# Altium PCB Camera.PcbDoc
Units mm, origin at the board's own origin, x right, y up, seen from the top; angles counter-clockwise.
Board outline 30 x 20 mm, 4 copper layers (Top Layer, L2 - GND, L2 - PWR/GND, Bottom Layer), stack 1.591 mm thick; 77 components, 31 nets, 305 pads, 41 vias.
Unrouted connection lines stored in the file: 94.
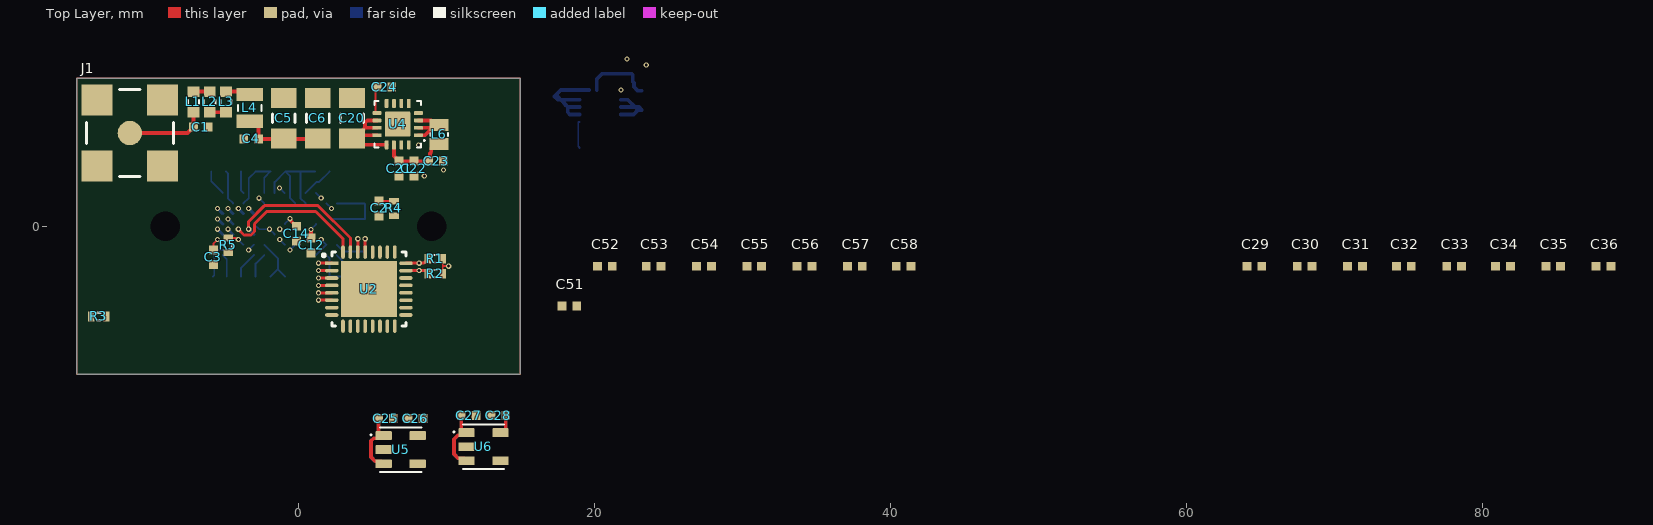
[diagram p0: Top Layer view]
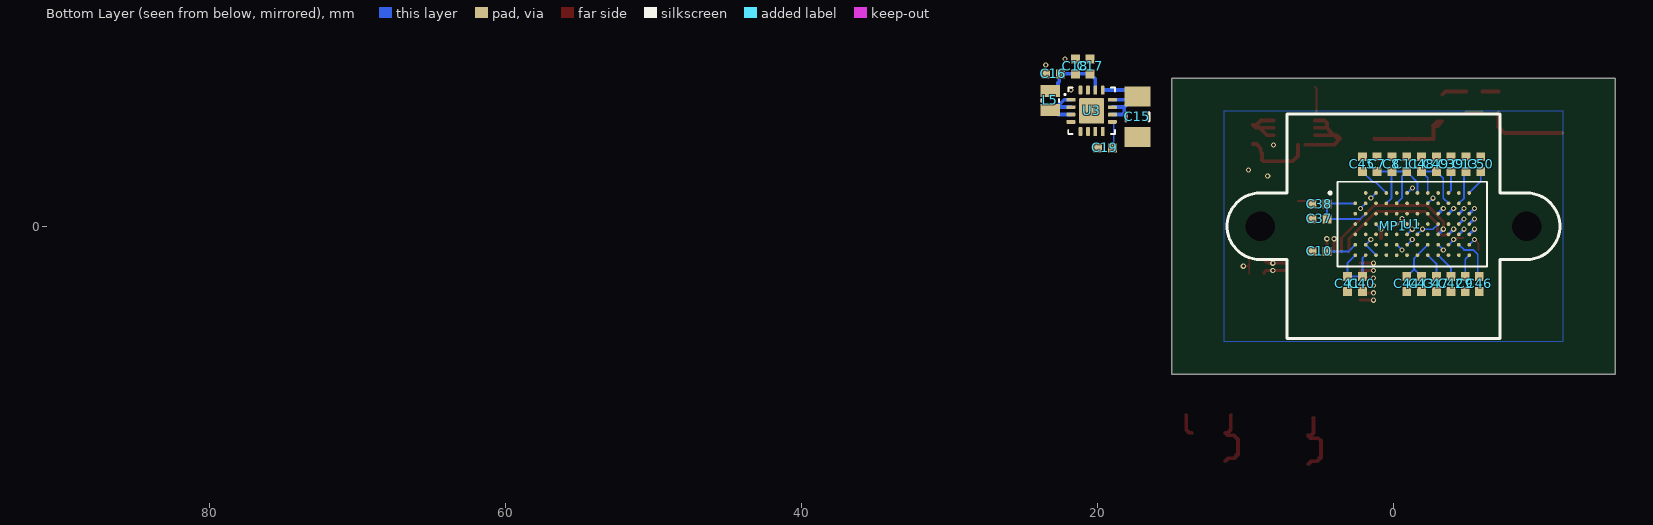
[diagram p1: Bottom Layer view, seen from below]
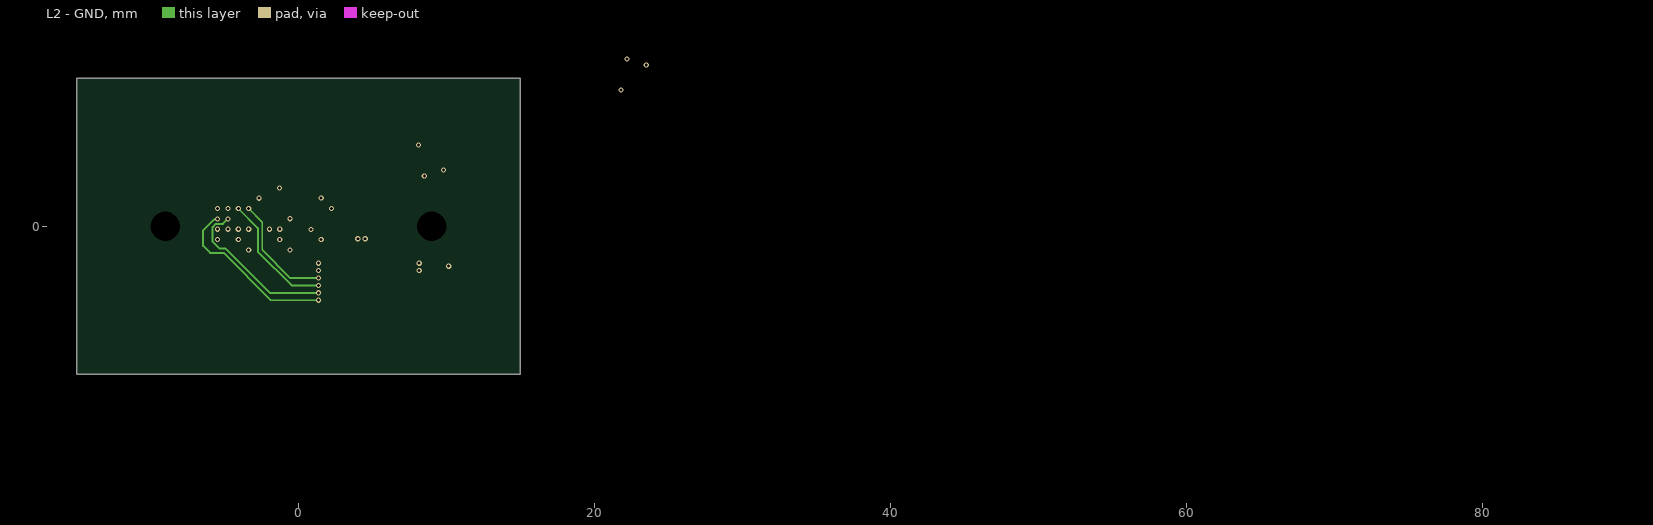
[diagram p2: L2 - GND]
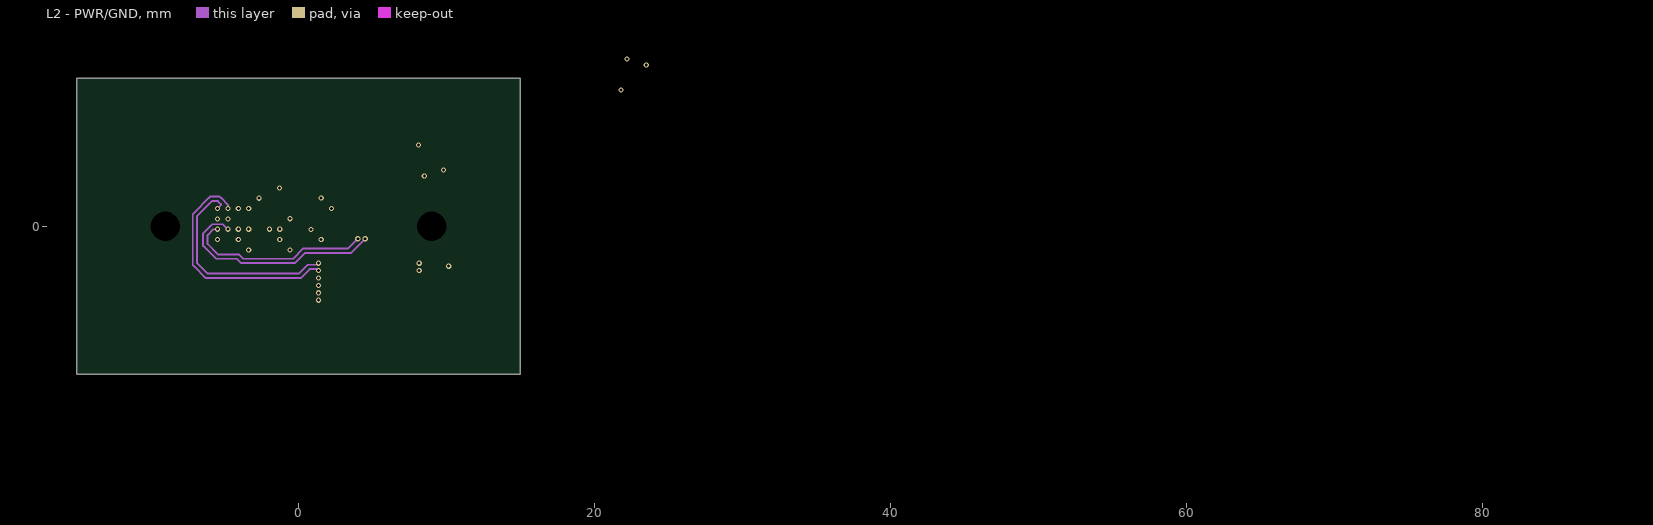
[diagram p3: L2 - PWR/GND]

## Layer stack, top to bottom
Top Solder: solder mask 0.015, SM-001, Dk 4
Top Layer: signal copper 0.035
Dielectric 2: prepreg 0.2104, PP-006, Dk 4.3
L2 - GND: signal copper 0.0175
Dielectric 1: core 1.065, FR4_TG135_TG150_Dk4.3_Df0.02, Dk 4.3
L2 - PWR/GND: signal copper 0.0175
Dielectric 3: prepreg 0.2104, PP-006, Dk 4.3
Bottom Layer: signal copper 0.035
Bottom Solder: solder mask 0.015, SM-001, Dk 4

## Board outline
-15,-10 15,-10 15,10 -15,10

## Design rules (kind name [scope] priority, off if disabled: settings)
AssemblyTestPointUsage [All] p1: isadvanced=TRUE
AssemblyTestpoint [All] p1: isadvanced=TRUE testpointundercomponent=TRUE minsize=1.016 maxsize=2.54 preferedsize=1.524 minholesize=0 maxholesize=1.016 preferedholesize=0.813 testpointgrid=0.025 usegrid=TRUE gridoriginx=166.25 gridoriginy=192.7 gridtolerance=0 allowsidetop=TRUE allowsidebottom=TRUE
BoardOutlineClearance BoardOutlineClearance_1 [All] p1: isadvanced=TRUE gap=0.2 ignorepadtopadclearanceinfootprint=FALSE
Clearance Clearance_1 [(ExistsOnLayer('L2 - GND') Or ExistsOnLayer('L2 - PWR/GND')) vs (ExistsOnLayer('L2 - GND') Or ExistsOnLayer('L2 - PWR/GND'))] p1: gap=0.1 ignorepadtopadclearanceinfootprint=FALSE sourcerule=46 cellrowname=All cellrowtype=0 cellcolname=All cellcoltype=0 innerlayers=TRUE
Clearance Clearance_2 [(ExistsOnLayer('Top Layer') Or ExistsOnLayer('Bottom Layer')) vs (ExistsOnLayer('Top Layer') Or ExistsOnLayer('Bottom Layer'))] p2: gap=0.1 ignorepadtopadclearanceinfootprint=FALSE sourcerule=46 cellrowname=All cellrowtype=0 cellcolname=All cellcoltype=0 outerlayers=TRUE
Clearance [All] p3: gap=0.254 ignorepadtopadclearanceinfootprint=FALSE ismatrix=TRUE
ComponentClearance ComponentClearance_LensHolder [InComponent('MP1')] p1: gap=-100 collisioncheckmode=3 verticalgap=-100 showdistances=FALSE
ComponentClearance [All] p2: isadvanced=TRUE gap=0.254 collisioncheckmode=3 verticalgap=0.254 showdistances=FALSE
DiffPairsRouting [All] p1: maxlimit=0.186 minlimit=0.17 mostfreqgap=0.186 toplayer_mingap=0.186 toplayer_minwidth=0.2 toplayer_maxwidth=0.2 toplayer_prefwidth=0.2 midlayer1_maxgap=0.17 midlayer1_prefgap=0.17 midlayer1_minwidth=0.127 midlayer1_maxwidth=0.127 midlayer1_prefwidth=0.127 midlayer2_maxgap=0.17 midlayer2_prefgap=0.17 midlayer2_minwidth=0.127 midlayer2_maxwidth=0.127 midlayer2_prefwidth=0.127 bottomlayer_mingap=0.186 bottomlayer_minwidth=0.2 bottomlayer_maxwidth=0.2 bottomlayer_prefwidth=0.2 impedanceprofiledriven=TRUE impedanceprofileid={404B1338-802D-463F-9344-648F71163B0D} impedanceprofilevalue=100.000000 maxuncoupledlength=12.7
FabricationTestPointUsage [All] p1: isadvanced=TRUE valid=0 allowmultiple=FALSE
FabricationTestpoint [All] p1: isadvanced=TRUE side=3 testpointundercomponent=TRUE minsize=1.016 maxsize=2.54 preferedsize=1.524 minholesize=0 maxholesize=1.016 preferedholesize=0.813 testpointgrid=0.025 allowsidetop=TRUE allowsidebottom=TRUE usegrid=TRUE gridoriginx=166.25 gridoriginy=192.7 gridtolerance=0
FanoutControl Fanout_BGA [IsBGA] p1: isadvanced=TRUE bgadir=Out bgaviamode=Centered fanoutstyle=Auto fanoutdirection=Alternating viagrid=0.025 // Fanout_BGA (Default Rule)
FanoutControl Fanout_LCC [IsLCC] p2: isadvanced=TRUE bgadir=Out bgaviamode=Centered fanoutstyle=Auto fanoutdirection=Alternating viagrid=0.025 // Fanout_LCC (Default Rule)
FanoutControl Fanout_SOIC [IsSOIC] p3: isadvanced=TRUE bgadir=Out bgaviamode=Centered fanoutstyle=Auto fanoutdirection=Alternating viagrid=0.025 // Fanout_SOIC (Default Rule)
FanoutControl Fanout_Small [(CompPinCount < 5)] p4: isadvanced=TRUE bgadir=Out bgaviamode=Centered fanoutstyle=Auto fanoutdirection=OutThenIn viagrid=0.025 // Fanout_Small (Default Rule)
FanoutControl Fanout_Default [All] p5: isadvanced=TRUE bgadir=Out bgaviamode=Centered fanoutstyle=Auto fanoutdirection=Alternating viagrid=0.025 // Fanout_Default (Default Rule)
Height [All] p1: isadvanced=TRUE minheight=0 maxheight=25.4 prefheight=12.7
HoleSize [All] p1: isadvanced=TRUE absolutevalues=TRUE maxlimit=5 minlimit=0.2 maxpercent=80.000 minpercent=20.000
HoleToHoleClearance [All] p1: isadvanced=TRUE gap=0.254 allowstackedmicrovias=TRUE
LayerPairs [All] p1: isadvanced=TRUE enforce=TRUE
MinimumSolderMaskSliver [All] p1: isadvanced=TRUE minsoldermaskwidth=0.1
NetAntennae [All] p1: isadvanced=TRUE netantennaetolerance=0
PasteMaskExpansion [All] p1: isadvanced=TRUE expansion=0
PlaneClearance [All] p1: isadvanced=TRUE clearance=0.254
PlaneConnect [All] p1: isadvanced=TRUE pad.planeconnectstyle=Relief pad.reliefexpansion=0.508 pad.reliefentries=4 pad.reliefconductorwidth=0.254 pad.reliefairgap=0.254 via.planeconnectstyle=Direct via.reliefexpansion=0.508 via.reliefentries=4 via.reliefconductorwidth=0.254 via.reliefairgap=0.254
PolygonConnect [All] p1: thpad.connectstyle=Relief thpad.reliefconductorwidth=0.127 thpad.reliefentries=4 thpad.polygonreliefangle="90 Angle" thpad.airgapwidth=0.127 smdpad.connectstyle=Relief smdpad.reliefconductorwidth=0.127 smdpad.reliefentries=4 smdpad.polygonreliefangle="90 Angle" smdpad.airgapwidth=0.127 via.connectstyle=Direct via.reliefconductorwidth=0.254 via.reliefentries=4 via.polygonreliefangle="90 Angle" via.airgapwidth=0.254
PolygonConnect PolygonConnectStyle_Direct [IsNamedPolygon('PolygonDirect')] p2: isadvanced=TRUE connectstyle=Direct reliefconductorwidth=0.254 reliefentries=2 polygonreliefangle="0 Angle" airgapwidth=0.254
RoutingCorners [All] p1: isadvanced=TRUE cornerstyle=45-Degree minsetback=2.54 maxsetback=2.54
RoutingPriority [All] p1: isadvanced=TRUE routingpriority=0
RoutingVias [All] p1: holewidth=0.3 width=0.45 viastyle="Through Hole" minholewidth=0.2 minwidth=0.35 maxholewidth=0.45 maxwidth=0.6
ShortCircuit [All] p1: isadvanced=TRUE allowed=FALSE
SilkToSilkClearance [All] p1: isadvanced=TRUE silktosilkclearance=0.127
SilkToSolderMaskClearance [IsPad] p1: isadvanced=TRUE minsilkscreentomaskgap=0.127 clearancetoexposedcopper=TRUE
SolderMaskExpansion SolderMaskExpansion_via [IsVia] p1: isadvanced=TRUE expansion=0.102 istentingtop=TRUE useseparateexpansions=TRUE expansionbottom=0.102 istentingbottom=TRUE
SolderMaskExpansion [All] p2: isadvanced=TRUE expansion=0.102 istentingtop=FALSE
SupplyNets "Schematic Supply Nets_6" [InNet('3V3')] p1: voltage=0.000
SupplyNets "Schematic Supply Nets_5" [InNet('2V8')] p2: voltage=0.000
SupplyNets "Schematic Supply Nets_4" [InNet('1V2')] p3: voltage=0.000
SupplyNets "Schematic Supply Nets_3" [InNet('1V8')] p4: voltage=0.000
SupplyNets "Schematic Supply Nets_1" [InNet('12V_VPOC')] p5: voltage=0.000
SupplyNets "Schematic Supply Nets" [InNet('GND')] p6: voltage=0.000
UnRoutedNet [All] p1: isadvanced=TRUE
UnpouredPolygon [All] p1: isadvanced=TRUE
Width [All] p1: maxlimit=0.254 minlimit=0.127 preferedwidth=0.254
3 further rules are at their usual default settings.

## Classes and differential pairs
net class S50: FPD_DATA FPD_DOUT_N FPD_DOUT_P
component class Power: C15 C16 C17 C18 C19 C20 C21 C22 C23 C24 C25 C26 C27 C28 L5 L6 U3 U4 U5 U6
component class Top: 2 C1 C2 C3 C4 C5 C6 C7 C8 C9 C10 C11 C12 C13 C14 C29 C30 C31 C32 C33 C34 C35 C36 C37 C38 C39 C40 C41 C42 C43 C44 C45 C46 C47 C48 C49 C50 C51 C52 C53 C54 C55 C56 C57 C58 J1 L1 L2 L3 L4 MP1 R1 R2 R3 R4 R5 U1 U2
differential pair MIPI_D3: +MIPI_D3_P -MIPI_D3_N
differential pair MIPI_D2: +MIPI_D2_P -MIPI_D2_N
differential pair MIPI_D1: +MIPI_D1_P -MIPI_D1_N
differential pair MIPI_D0: +MIPI_D0_P -MIPI_D0_N
differential pair MIPI_CLK: +MIPI_CLK_P -MIPI_CLK_N

## Components (designator, comment, footprint, x,y, rotation, side; value= is the part's Value field where it differs from the comment)
C1 "GRM155R71H473KE14D" "Generic 0402 capacitor" -6.6,6.7 r180 top value=47nF
C2 "GRM155R71H473KE14D" "Generic 0402 capacitor" 5.45,1.2 r90 top value=47nF
C3 "MAASL105CD7105MFCA01" "Generic 0402 capacitor" -5.75,-2.1 r90 top value=1µF
C4 "GRT155R71H104KE01D" "Generic 0402 capacitor" -3.2,5.9 r0 top value=100nF
C5 "CL31A106MBHNNNE" "Generic 1206 Capacitor" -1,7.3 r270 top value=10µF
C6 "CL31A106MBHNNNE" "Generic 1206 Capacitor" 1.3,7.3 r270 top value=10µF
C7 "GRT155R71H104KE01D" "Generic 0402 capacitor" 1.1,4.2 r270 bottom value=100nF
C8 "GRT155R71H104KE01D" "Generic 0402 capacitor" 0.1,4.2 r270 bottom value=100nF
C9 "GRT155R71H104KE01D" "Generic 0402 capacitor" -4.85,-3.9 r90 bottom value=100nF
C10 "GRT155R71H104KE01D" "Generic 0402 capacitor" 5,-1.7 r180 bottom value=100nF
C11 "GRT155R71H104KE01D" "Generic 0402 capacitor" -0.9,4.2 r270 bottom value=100nF
C12 "GRT155R71H104KE01D" "Generic 0402 capacitor" 0.85,-1.3 r90 top value=100nF
C13 "GRT155R71H104KE01D" "Generic 0402 capacitor" -4.9,4.2 r270 bottom value=100nF
C14 "GRT155R71H104KE01D" "Generic 0402 capacitor" -0.15,-0.5 r90 top value=100nF
C15 "CL31A106MBHNNNE" "Generic 1206 Capacitor" 17.3,7.4 r90 bottom value=10µF
C16 "MAASL105CD7105MFCA01" "Generic 0402 capacitor" 23,10.3 r180 bottom value=1µF
C17 "GRT155C80J106ME13J" "Generic 0402 capacitor" 20.5,10.8 r270 bottom value=10µF
C18 "GRT155C80J106ME13J" "Generic 0402 capacitor" 21.5,10.8 r270 bottom value=10µF
C19 "GCM155R72A472KA37D" "Generic 0402 capacitor" 19.5,5.3 r180 bottom value=4.7nF
C20 "CL31A106MBHNNNE" "Generic 1206 Capacitor" 3.6,7.3 r270 top value=10µF
C21 "MAASL105CD7105MFCA01" "Generic 0402 capacitor" 6.8,3.9 r90 top value=1µF
C22 "GRT155C80J106ME13J" "Generic 0402 capacitor" 7.8,3.9 r90 top value=10µF
C23 "GRT155C80J106ME13J" "Generic 0402 capacitor" 9.3,4.4 r180 top value=10µF
C24 "GCM155R72A472KA37D" "Generic 0402 capacitor" 5.8,9.4 r180 top value=4.7nF
C25 "MAASL105CD7105MFCA01" "Generic 0402 capacitor" 5.9,-13 r180 top value=1µF
C26 "MAASL105CD7105MFCA01" "Generic 0402 capacitor" 7.9,-13 r0 top value=1µF
C27 "MAASL105CD7105MFCA01" "Generic 0402 capacitor" 11.5,-12.8 r180 top value=1µF
C28 "MAASL105CD7105MFCA01" "Generic 0402 capacitor" 13.5,-12.8 r0 top value=1µF
C29 "GRT155R71H104KE01D" "Generic 0402 capacitor" 64.599,-2.7 r0 top value=100nF
C30 "GRT155R71H104KE01D" "Generic 0402 capacitor" 67.999,-2.7 r0 top value=100nF
C31 "GRT155R71H104KE01D" "Generic 0402 capacitor" 71.399,-2.7 r0 top value=100nF
C32 "GRT155R71H104KE01D" "Generic 0402 capacitor" 74.699,-2.7 r0 top value=100nF
C33 "GRT155R71H104KE01D" "Generic 0402 capacitor" 78.099,-2.7 r0 top value=100nF
C34 "GRT155R71H104KE01D" "Generic 0402 capacitor" 81.399,-2.7 r0 top value=100nF
C35 "GRT155R71H104KE01D" "Generic 0402 capacitor" 84.799,-2.7 r0 top value=100nF
C36 "GRT155R71H104KE01D" "Generic 0402 capacitor" 88.199,-2.7 r0 top value=100nF
C37 "GRT155R71H104KE01D" "Generic 0402 capacitor" 5,0.5 r180 bottom value=100nF
C38 "GRT155R71H104KE01D" "Generic 0402 capacitor" 5,1.5 r180 bottom value=100nF
C39 "GRT155R71H104KE01D" "Generic 0402 capacitor" -3.9,4.2 r270 bottom value=100nF
C40 "GRT155R71H104KE01D" "Generic 0402 capacitor" 2.1,-3.9 r90 bottom value=100nF
C41 "GRT155R71H104KE01D" "Generic 0402 capacitor" 3.1,-3.9 r90 bottom value=100nF
C42 "GRT155R71H104KE01D" "Generic 0402 capacitor" -3.9,-3.9 r90 bottom value=100nF
C43 "GRT155R71H104KE01D" "Generic 0402 capacitor" -1.9,-3.9 r90 bottom value=100nF
C44 "GRT155R71H104KE01D" "Generic 0402 capacitor" -0.9,-3.9 r90 bottom value=100nF
C45 "GRT155R71H104KE01D" "Generic 0402 capacitor" 2.1,4.2 r270 bottom value=100nF
C46 "GRT155R71H104KE01D" "Generic 0402 capacitor" -5.8,-3.9 r90 bottom value=100nF
C47 "GRT155R71H104KE01D" "Generic 0402 capacitor" -2.9,-3.9 r90 bottom value=100nF
C48 "GRT155R71H104KE01D" "Generic 0402 capacitor" -1.9,4.2 r270 bottom value=100nF
C49 "GRT155R71H104KE01D" "Generic 0402 capacitor" -2.9,4.2 r270 bottom value=100nF
C50 "GRT155R71H104KE01D" "Generic 0402 capacitor" -5.9,4.2 r270 bottom value=100nF
C51 "GRT155R71H104KE01D" "Generic 0402 capacitor" 18.3,-5.4 r0 top value=100nF
C52 "GRT155R71H104KE01D" "Generic 0402 capacitor" 20.7,-2.7 r0 top value=100nF
C53 "GRT155R71H104KE01D" "Generic 0402 capacitor" 24,-2.7 r0 top value=100nF
C54 "GRT155R71H104KE01D" "Generic 0402 capacitor" 27.4,-2.7 r0 top value=100nF
C55 "GRT155R71H104KE01D" "Generic 0402 capacitor" 30.8,-2.7 r0 top value=100nF
C56 "GRT155R71H104KE01D" "Generic 0402 capacitor" 34.2,-2.7 r0 top value=100nF
C57 "GRT155R71H104KE01D" "Generic 0402 capacitor" 37.599,-2.7 r0 top value=100nF
C58 "GRT155R71H104KE01D" "Generic 0402 capacitor" 40.899,-2.7 r0 top value=100nF
J1 "MCX-J-P-H-ST-SM1-TR" MCX-J-P-H-ST-SM1-TR -11.4,6.3 r0 top
L1 "BLM18HE152SN1D" 0603_1.6x0.8x0.8mm_IND -7.1,8.4 r90 top
L2 "BLM18HE152SN1D" 0603_1.6x0.8x0.8mm_IND -6,8.4 r270 top
L3 "BLM18HE152SN1D" 0603_1.6x0.8x0.8mm_IND -4.9,8.4 r90 top
L4 "BRC2016T100K" 0805_2.0x1.6x1.6mm_IND -3.3,8 r270 top value=10µH
L5 "HTEH20120H2R2MSR" 0805_2.0x1.2x0.8mm_IND 23.2,8.5 r90 bottom value=2.2µH
L6 "HTEH20120H2R2MSR" 0805_2.0x1.2x0.8mm_IND 9.5,6.2 r270 top value=2.2µH
MP1 "PT-LH008P" M12_lens_holder 0,0 r0 bottom locked
R1 "RMCF0402JT1K50" "Generic 0402 Resistor" 9.25,-2.2 r0 top value=1.5k
R2 "RMCF0402JT1K50" "Generic 0402 Resistor" 9.25,-3.2 r0 top value=1.5k
R3 "RCA04024K02FKEDSR" "Generic 0402 Resistor" -13.5,-6.1 r0 top value=4.02k
R4 "RMCA0402FT49R9-HP" "Generic 0402 Resistor" 6.45,1.2 r90 top value=49.9
R5 "RMCF0402JT1K50" "Generic 0402 Resistor" -4.75,-1.3 r270 top value=1.5k
U1 "AR0234CSSM00SUKA0-CP" 83-VFBGA -1.271,0.148 r180 bottom locked
U2 "DS90UB953TRHBTQ1" VQFN-32_5x5x1.0mm_P0.5mm 4.753,-4.25 r0 top
U3 "TPS62152RGTR" VQFN-16_3x3x1.0mm_P0.5mm 20.4,7.8 r180 bottom
U4 "TPS62151RGTR" VQFN-16_3x3x1.0mm_P0.5mm 6.7,6.9 r180 top
U5 "TPS7A2028PDBVR" SOT23-3_3x5x1.1mm_P0.95mm 6.9,-15.1 r0 top
U6 "TLV75512PDBVR" SOT23-3_3x5x1.1mm_P0.95mm 12.5,-14.9 r0 top

## Footprints (in the part's own frame and the unit in brackets; to place one, negate y for a bottom-side part, rotate by r counter-clockwise, add the part's x,y. Pads: shape width x height; smd on the part's side, far side on the other; paste and mask are expansions set on the pad)
83-VFBGA [mm] "AR0234CSSM00SUKA0-CP"
  round 0.25 smd: A2(-3.15,2.1) A3(-2.45,2.1) A4(-1.75,2.1) A5(-1.05,2.1) A6(-0.35,2.1) A7(0.35,2.1) A8(1.05,2.1) A9(1.75,2.1) A10(2.45,2.1) A11(3.15,2.1) A12(3.85,2.1) B1(-3.85,1.4) B2(-3.15,1.4) B3(-2.45,1.4) B4(-1.75,1.4) B5(-1.05,1.4) B6(-0.35,1.4) B7(0.35,1.4) B8(1.05,1.4) B9(1.75,1.4) B10(2.45,1.4) B11(3.15,1.4) B12(3.85,1.4) C1(-3.85,0.7) C2(-3.15,0.7) C3(-2.45,0.7) C4(-1.75,0.7) C5(-1.05,0.7) C6(-0.35,0.7) C7(0.35,0.7) C8(1.05,0.7) C9(1.75,0.7) C10(2.45,0.7) C11(3.15,0.7) C12(3.85,0.7) D1(-3.85,0) D2(-3.15,0) D3(-2.45,0) D4(-1.75,0) D5(-1.05,0) D6(-0.35,0) D7(0.35,0) D8(1.05,0) D9(1.75,0) D10(2.45,0) D11(3.15,0) D12(3.85,0) E1(-3.85,-0.7) E2(-3.15,-0.7) E3(-2.45,-0.7) E4(-1.75,-0.7) E5(-1.05,-0.7) E6(-0.35,-0.7) E7(0.35,-0.7) E8(1.05,-0.7) E9(1.75,-0.7) E10(2.45,-0.7) E11(3.15,-0.7) E12(3.85,-0.7) F1(-3.85,-1.4) F2(-3.15,-1.4) F3(-2.45,-1.4) F4(-1.75,-1.4) F5(-1.05,-1.4) F6(-0.35,-1.4) F7(0.35,-1.4) F8(1.05,-1.4) F9(1.75,-1.4) F10(2.45,-1.4) F11(3.15,-1.4) F12(3.85,-1.4) G1(-3.85,-2.1) G2(-3.15,-2.1) G3(-2.45,-2.1) G4(-1.75,-2.1) G5(-1.05,-2.1) G6(-0.35,-2.1) G7(0.35,-2.1) G8(1.05,-2.1) G9(1.75,-2.1) G10(2.45,-2.1) G11(3.15,-2.1) G12(3.85,-2.1)
  silkscreen extent -5.62,-2.86 5.06,2.86, body extent -5,-2.8 5,2.8, height 0.76
0603_1.6x0.8x0.8mm_IND [mm] "BLM18HE152SN1D"
  rect 0.7x0.8 smd paste+0 mask+0: 1(-0.7,0) 2(0.7,0)
  silkscreen extent -0.13,-0.38 0.13,0.38, body extent -0.8,-0.4 0.8,0.4, height 0.95
0805_2.0x1.2x0.8mm_IND [mm] "Cyntech 0805 inductor"
  rect 0.8x1.3 smd paste+0 mask+0: 1(-0.65,0) 2(0.65,0)
  silkscreen extent -0.1,-0.6 0.1,0.6, body extent -1,-0.6 1,0.6, height 0.8
0805_2.0x1.6x1.6mm_IND [mm] "BRC2016T100K inductor"
  rect 0.9x1.8 smd: 1(-0.9,0) 2(0.9,0)
  silkscreen extent -0.2,-0.8 0.2,0.8, body extent -1,-0.8 1,0.8, height 1.8
"Generic 0402 capacitor" [mm] "Generic 0402 capacitor"
  rect 0.6x0.6 smd: 1(-0.5,0) 2(0.5,0)
  body extent -0.5,-0.25 0.5,0.25, height 0.5
"Generic 0402 Resistor" [mm]
  rect 0.45x0.65 smd: 1(-0.5,0) 2(0.5,0)
  silkscreen extent -0.1,-0.25 0.1,0.25, body extent -0.5,-0.25 0.5,0.25, height 0.35
"Generic 1206 Capacitor" [mm] "Chip Capacitor, 2-Leads, Body 3.20x1.60mm, IPC Medium Density"
  rect 1.35x1.75 smd: 1(-1.375,0) 2(1.375,0)
  silkscreen extent -0.3,-0.77 0.3,0.77, body extent -1.6,-0.8 1.6,0.8, height 1.6
M12_lens_holder [mm]
  round 0 hole 2 unplated: H1(-9,0) H2(9,0)
  silkscreen extent -11.25,-7.6 11.25,7.6, body extent -11.24,-7.55 11.24,7.55, height 12
MCX-J-P-H-ST-SM1-TR [mm]
  round 1.65 smd paste+0 mask+0: 1(0,0)
  rect 2.1x2.1 smd paste+0 mask+0: S1(-2.22,2.22) S2(2.22,2.22) S3(2.22,-2.22) S4(-2.22,-2.22)
  silkscreen extent -2.94,-2.94 2.94,2.94, body extent -2.94,-2.94 2.94,2.94, height 6
SOT23-3_3x5x1.1mm_P0.95mm [mm] "TI SOT-23-5"
  rrect16% 1.1x0.6 smd: 1(-1.15,0.95) 2(-1.15,0) 3(-1.15,-0.95) 4(1.15,-0.95) 5(1.15,0.95)
  silkscreen extent -2.05,-1.5 1.4,1.5, body extent -2.55,-1.95 2.55,1.95, height 0.25
VQFN-16_3x3x1.0mm_P0.5mm [mm] "16-VQFN (3x3)"
  rrect40% 0.6x0.25 smd: 1(-1.4,0.75) 2(-1.4,0.25) 3(-1.4,-0.25) 4(-1.4,-0.75) 9(1.4,-0.75) 10(1.4,-0.25) 11(1.4,0.25) 12(1.4,0.75)
  rrect40% 0.25x0.6 smd: 5(-0.75,-1.4) 6(-0.25,-1.4) 7(0.25,-1.4) 8(0.75,-1.4) 13(0.75,1.4) 14(0.25,1.4) 15(-0.25,1.4) 16(-0.75,1.4)
  rrect6% 1.7x1.7 smd: 17(0,0)
  silkscreen extent -1.85,-1.57 1.57,1.58, body extent -1.5,-1.5 1.5,1.5, height 1
VQFN-32_5x5x1.0mm_P0.5mm [mm] "TI 32-VFQFN (5x5)"
  rect 0.906x0.242 smd: 1(-2.503,1.75)
  rrect100% 0.906x0.242 smd: 2(-2.503,1.25) 3(-2.503,0.75) 4(-2.503,0.25) 5(-2.503,-0.25) 6(-2.503,-0.75) 7(-2.503,-1.25) 8(-2.503,-1.75) 17(2.503,-1.75) 18(2.503,-1.25) 19(2.503,-0.75) 20(2.503,-0.25) 21(2.503,0.25) 22(2.503,0.75) 23(2.503,1.25) 24(2.503,1.75)
  rrect100% 0.242x0.906 smd: 9(-1.75,-2.503) 10(-1.25,-2.503) 11(-0.75,-2.503) 12(-0.25,-2.503) 13(0.25,-2.503) 14(0.75,-2.503) 15(1.25,-2.503) 16(1.75,-2.503) 25(1.75,2.503) 26(1.25,2.503) 27(0.75,2.503) 28(0.25,2.503) 29(-0.25,2.503) 30(-0.75,2.503) 31(-1.25,2.503) 32(-1.75,2.503)
  rect 3.8x3.8 smd paste-2539.97: 33(0,0)
  silkscreen extent -3.15,-2.5 2.5,2.5, body extent -2.5,-2.5 2.5,2.5, height 1

## Part data
C1 C2: library part CMP-001-00113-1, "50V 47nF X7R ±10% 0402 Multilayer Ceramic Capacitors MLCC - SMD/SMT ROHS", Capacitor Type=Ceramic, Case/Package=0402, Max Operating Temperature=125°C, Min Operating Temperature=-55°C, Tolerance=10%, Voltage Rating=50V, AECQ=No, Mounting Technology=SMD, Pins=2
C3 C16 C21 C25 C26 C27 C28: library part CMP-001-00104-2, "Cap Cer 1UF 20V X7T 0402", Capacitor Type=Ceramic, Case/Package=0402, Max Operating Temperature=125°C, Min Operating Temperature=-55°C, Temperature Coefficient=X7R, Tolerance=20%, Voltage Rating=10V, AECQ=Yes, Mounting Technology="Surface Mount", Pins=2, RoHS Compliant=Yes
C4 C7 C8 C9 C10 C11 C12 C13 C14 C29 C30 C31 C32 C33 C34 C35 C36 C37 C38 C39 C40 C41 C42 C43 C44 C45 C46 C47 C48 C49 C50 C51 C52 C53 C54 C55 C56 C57 C58: library part CMP-001-00084-12, "Ceramic Capacitor, Multilayer, Ceramic, 50V, 10% +Tol, 10% -Tol, X7R, 15% TC, 0.1uF, Surface Mount, 0402", Capacitor Type=Ceramic, Case/Package=0402, Max Operating Temperature=125°C, Min Operating Temperature=-55°C, Package Shape=Rectangular, Temperature Coefficient=X7R, Tolerance=10%, Voltage Rating=50V, AECQ=Yes, Dielectric Material=Ceramic, Mounting Technology="Surface Mount", Multilayer=Yes, Packaging="Tape and Reel", Pins=2, Reach SVHC Compliant=Yes, RoHS Compliant=Yes, Terminal Finish=Nickel, Termination=Wraparound
C5 C6 C15 C20: library part CMP-001-00092-6, "Ceramic Capacitor, Multilayer, Ceramic, 50V, 20% +Tol, 20% -Tol, X5R, 15% TC, 10uF, Surface Mount, 1206", Capacitor Type=Ceramic, Case/Package=1206, Max Operating Temperature=85°C, Min Operating Temperature=-55°C, Package Shape=Rectangular, Temperature Characteristics Code=X5R, Tolerance=20%, Voltage Rating=50V, AECQ=No, Dielectric Material=Ceramic, JESD-609 Code=e3, Mounting Technology="Surface Mount", Multilayer=Yes, Packaging="Tape and Reel", Pins=2, Reach SVHC Compliant=Yes, RoHS Compliant=Yes, Temperature Coefficient=X5R, Terminal Finish=Nickel, Termination=Wraparound
C17 C18 C22 C23: library part CMP-001-00108-2, "Multilayer Ceramic Capacitors MLCC - SMD/SMT 0402 10uF 6.3VDC 20% X6S AEC-Q200", Capacitor Type=Ceramic, Case/Package=0402, Max Operating Temperature=105°C, Min Operating Temperature=-55°C, Temperature Coefficient=X6S, Tolerance=20%, Voltage Rating=6.3V, AECQ=Yes, Mounting Technology="Surface Mount", Pins=2, RoHS Compliant=Yes
C19 C24: library part CMP-001-00110-2, "Ceramic Capacitor, Multilayer, Ceramic, 100V, 10% +Tol, 10% -Tol, X7R, 15% TC, 0.0047uF, Surface Mount, 0402", Capacitor Type=Ceramic, Case/Package=0402, Max Operating Temperature=125°C, Min Operating Temperature=-55°C, Temperature Coefficient=X7R, Tolerance=10%, Voltage Rating=100V, AECQ=Yes, Mounting Technology=SMD, Pins=2, RoHS Compliant=Yes
J1: library part CMP-002-00134-1, "RF / Coaxial Connector, MCX Coaxial, Straight Jack, Surface Mount Vertical, 50 ohm", Case/Package=SMD/SMT, Manufacturer=Samtec, Max Current Rating=1.5A, Max Operating Temperature=125°C, Min Operating Temperature=-65°C, Connector Type=Solder, Gender=Female, Length=5.88mm, Mounting Technology=Board, Orientation=Straight, Pins=2
L1 L2 L3: library part CMP-006-00026-1, "Ferrite Beads Multi-Layer 1.5KOhm 25% 100MHz 500mA 500mOhm DCR 0603 T/R", Case/Package=0603, Current - Saturation=13.3A, Current Rating=400mA, Max Operating Temperature=125°C, Min Operating Temperature=-55°C, Tolerance=25%, AECQ=no, DCR=20.5m, Height=800µm, Pins=2, Shileded=Yes
L4: library part CMP-006-00025-2, "IND 10UH 20% 3.1A SHD", Case/Package=0806, Current - Saturation=3.3A, Current Rating=450mA, Max Operating Temperature=105°C, Min Operating Temperature=-40°C, Self Resonant Frequency=35MHz, Tolerance=10%, AECQ=No, DCR=0.52, Height=1.6mm, Pins=2, Shileded=Yes
L5 L6: library part CMP-006-00027-1, "General Purpose Inductor, 2.2uH, 20%, 1 Element, Metal Dust-Core, SMD, 0805", Case/Package=0805, Current - Saturation=1.8A, Current Rating=2A, Max Operating Temperature=125°C, Min Operating Temperature=-55°C, Tolerance=20%, AECQ=No, DCR=98m, Height=800µm, Pins=2
MP1: library part CMP-00014-1, "M12 camera lens holder"
R1 R2 R5: library part CMP-009-00226-1, "Res Thick Film 0402 1.5K Ohm 5% 0.063W ±100ppm/°C Molded SMD Paper T/R", Case/Package=0402, Max Operating Temperature=155°C, Min Operating Temperature=-55°C, Power=62.5mW, Tolerance=5%, AECQ=Yes, Mounting Technology="Surface Mount", Pins=2, RoHS Compliant=Yes
R3: library part CMP-009-00241-1, "Fixed Resistor, Metal Glaze/Thick Film, 0.063W, 4020ohm, 50V, 1% +/-Tol, Surface Mount, 0402", Case/Package=0402, Manufacturer Part Number=Blank, Max Operating Temperature=155°C, Min Operating Temperature=-55°C, Power=62.5mW, Tolerance=1%, Voltage Rating=50V, AECQ=Yes, Mounting Technology=SMD, Pins=2
R4: library part CMP-009-00240-1, "RES, 0402, 49.9 ohm, 1%, 0.1W, AUTO", Case/Package=0402, Max Operating Temperature=155°C, Min Operating Temperature=-55°C, Power=62.5mW, Tolerance=1%, Voltage Rating=50V, AECQ=Yes, Manufacturer Part Number=RMCA0402FT49R9-HP, Mounting Technology=SMD, Pins=2
U1: library part CMP-031-00017-2, "1/2.6-inch 2.3 Mp CMOS Digital Image Sensor with Global Shutter 2.3MP 1/2.6, Mono, 0 deg CRA", Case/Package=83-VFBGA, Max Operating Temperature=85°C, Max Supply Voltage=1.26V, Min Operating Temperature=-40°C, Min Supply Voltage=1.14V, MPN=TJA1051TK/3/1J, AECQ=Yes, Mounting Technology="Surface Mount", Pins=8
U2: library part CMP-010-00047-1, "2 MP MIPI® CSI-2 FPD-Link III serializer for 2MP/60fps cameras & radar 32-VQFN -40 to 105", Case/Package="32-VQFN (5x5)", Max Operating Temperature=105°C, Max Supply Voltage=3.6V, Min Operating Temperature=-40°C, Min Supply Voltage=800mV, Nominal Supply Current=370µA, Nominal Supply Voltage=5.7V, Output Current=6A, Mounting Technology=SMD, Pins=32, Sensor Type="Current shunt amp"
U3: library part CMP-019-00063-1, "3–17V 1A Step-Down Converter in 3x3 QFN package 16-VQFN -40 to 125", Case/Package="16-VQFN (3x3)", Frequency=1.7MHz, Max Operating Temperature=125°C, Max Supply Voltage=17V, Min Operating Temperature=-40°C, Min Supply Voltage=3V, Output Current=1A, Output Voltage=3.3V, Mounting Technology=SMD, Pins=16, RoHS Compliant=Yes
U4: library part CMP-019-00064-1, "IC REG BUCK 1.8V 1A 16QFN / Buck Switching Regulator IC Positive Fixed 1.8V 1 Output 1A 16-VFQFN Exposed Pad", Case/Package="16-VQFN (3x3)", Frequency=1.7MHz, Max Operating Temperature=125°C, Max Supply Voltage=17V, Min Operating Temperature=-40°C, Min Supply Voltage=3V, Output Current=1A, Output Voltage=1.8V, Mounting Technology=SMD, Pins=16, RoHS Compliant=Yes
U5: library part CMP-019-00066-2, "300mA ultra-low-noise low-IQ low-dropout (LDO) linear regulator with high PSRR 5-SOT-23 -40 to 125", Case/Package=SOT-23, Dropout Voltage=145mV, Frequency=1.7MHz, Max Operating Temperature=125°C, Max Supply Voltage=6V, Min Operating Temperature=-40°C, Min Supply Voltage=3.1V, Output Current=300mA, Output Voltage=2.8V, Mounting Technology=SMD, Pins=5, RoHS Compliant=Yes
U6: library part CMP-019-00067-2, "500mA high-PSRR low-IQ low-dropout voltage regulator with enable 5-SOT-23 -40 to 125", Case/Package=SOT-23, Dropout Voltage=238mV, Frequency=1.7MHz, Max Operating Temperature=125°C, Max Supply Voltage=5.5V, Min Operating Temperature=-40°C, Min Supply Voltage=1.45V, Nominal Supply Current=25µA, Output Current=500mA, Output Voltage=1.2V, Mounting Technology=SMD, Pins=5, RoHS Compliant=Yes

## Via types
v1: diameter 0.35, hole 0.2, Top Layer to Bottom Layer, tented both sides, 41 vias

## Nets (pads, with @x,y where several pads share a name; then routed paths per layer and width w, separated by ;. In a path a pad name is that pad's centre, name@x,y a point inside that pad or via, vN(x,y) a via of type N, cw(c..) or ccw(c..) an arc to the next point about the centre after c; other vN are vias at no path point)
1V2: C28.2 C45.2 C46.2 C47.2 C48.2 C49.2 C50.2 U1.A4 U1.A8 U1.A12 U1.B10 U1.C8 U1.D7 U1.E1 U1.F11 U1.G8 U6.5 | length 15.3
  Top Layer w0.254: U6.5 13.827,-13.95 14,-13.777 C28.2
  Bottom Layer w0.127: C50.2 -5.9,3.027 U1.A12 ; C46.2 -5.7,-3.3 -5.7,-1.9 -5.4,-1.6 -4.769,-1.6 U1.F11 ; U1.B10 -3.365,1.904 -3.365,3.235 C49.2 C48.2 -2.321,3.279 U1.A8 ; C47.2 -2.9,-2.531 U1.G8 ; U1.A4 1.231,3 1.4,3 C45.2
1V8: C7.2 C8.2 C9.2 C10.2 C11.2 C12.2 C13.2 C14.2 C21.2 C22.2 C23.2 C27.2 C29.2 C30.2 C31.2 C32.2 C33.2 C34.2 C35.2 C36.2 C51.2 C52.2 C53.2 C54.2 C55.2 C56.2 C57.2 C58.2 L6.2 U1.A7 U1.B4 U1.B5 U1.B11 U1.D3 U1.D6 U1.D10 U1.F1 U1.G12 U2.10 U2.11 U2.15 U2.16 U2.25 U2.26 U4.14 U6.1 U6.3 | length 26.1
  Top Layer w0.254: v1(-0.576,0.508) -0.558,0.489 -0.558,0.408 C14.2 ; v1(0.834,-0.212) 0.842,-0.219 0.842,-0.792 C12.2 ; U4.14 6.45,4.75 C21.2 C22.2 C23.2 8.882,4.482 8.882,4.932 8.977,5.027 8.977,5.277 9.25,5.55 L6.2 ; C27.2 11,-13.777 11.173,-13.95 U6.1 11.177,-14.123 10.777,-14.123 10.5,-14.4 10.5,-15.4 10.777,-15.677 11.177,-15.677 U6.3
  Bottom Layer w0.127: U1.G12 -4.85,-2.223 C9.2 ; C13.2 -4.769,3.569 -4.769,1.896 U1.B11 ; U1.A7 -1.621,2.979 C11.2 ; U1.D6@-0.926,0.157 v1(-0.576,0.508) ; U1.B5 -0.571,1.898 -0.571,3.371 C11.2 ; U1.B4 0.129,1.898 0.129,3.671 C8.2 ; v1(0.834,-0.212) U1.D3@1.184,0.139 ; C7.2 C8.2 ; U1.F1 3.027,-1.7 C10.2 ; C11.2 C8.2
2V8: C26.2 C37.2 C38.2 C39.2 C40.2 C41.2 C42.2 C43.2 C44.2 U1.A10 U1.B1 U1.B8 U1.C2 U1.F8 U1.G1 U1.G2 U1.G7 U1.G9 U5.5 | length 17.2
  Bottom Layer w0.127: C42.2 -3.9,-2.831 U1.G9 ; C39.2 -3.9,2.427 U1.A10 ; v1(-2.681,1.893) U1.B8@-2.33,1.543 ; U1.F8 U1.G7 -1.4,-2.173 -1.4,-2.9 ; C43.2 -1.4,-2.9 ; C44.2 -1.4,-2.9 ; U1.G2 2.1,-2.173 C40.2 C41.2 3.1,-2.473 U1.G1 ; U1.C2 2.227,0.5 C37.2 C38.2 4.452,1.548 U1.B1
3V3: C16.2 C17.2 C18.2 C25.2 L5.2 R1.2 R2.2 U3.14 U5.1 U5.3 | length 10.8
  Top Layer w0.127: R2.2 9.75,-2.7 ; R1.2 9.75,-2.7 ; v1(10.15,-2.7) 9.75,-2.7
  Top Layer w0.254: C25.2 5.4,-13.977 5.573,-14.15 U5.1 5.577,-14.323 5.077,-14.323 4.9,-14.5 4.9,-15.6 5.177,-15.877 5.577,-15.877 U5.3
  Bottom Layer w0.254: U3.14 20.15,9.95 C17.2 C18.2 C16.2 22.582,10.218 22.582,9.768 22.677,9.673 22.677,9.423 22.95,9.15 L5.2
12V_VPOC: C4.2 C5.2 C6.2 C15.2 C20.2 L4.2 R3.2 U3.10 U3.11 U3.12 U3.13 U4.10 U4.11 U4.12 U4.13 | length 21.6
  Top Layer w0.254: C4.2 -2.7,6.777 L4.2@-2.65,6.777 ; C4.2@-2.65,5.9 -1.025,5.9 C5.2 -0.972,5.897 1.272,5.897 C6.2 ; U4.12 C20.2@4.025,6.15 ; U4.11 4.497,6.65 ; U4.10 4.65,7.15 4.5,7 4.5,6.653 4.497,6.65 ; U4.13 4.025,5.5 C20.2 ; L4.2@-2.65,6.777 -2.977,6.777 L4.2 -2.973,7.1 L4.2@-2.65,6.777 ; C20.2 3.8,5.925 C20.2@4.025,6.15 ; C20.2 3.825,6.15 C20.2@4.025,6.15 ; C20.2@4.025,6.15 4.348,6.473 4.348,6.501 4.497,6.65
  Bottom Layer w0.254: U3.10 18.35,7.55 18.2,7.7 18.2,8.047 18.197,8.05 ; U3.11 18.197,8.05 ; U3.12 C15.2@17.725,8.55 ; U3.13 17.725,9.2 C15.2 ; C15.2 17.5,8.775 C15.2@17.725,8.55 ; C15.2 17.525,8.55 C15.2@17.725,8.55 ; C15.2@17.725,8.55 18.048,8.227 18.048,8.199 18.197,8.05
12V_VPOC_L1: L1.2 L2.1 | length 1.1
  Top Layer w0.254: L1.2 L2.1
12V_VPOC_L2: L2.2 L3.1 | length 1.1
  Top Layer w0.254: L2.2 L3.1
12V_VPOC_L3: L3.2 L4.1 R3.1 | length 1.7
  Top Layer w0.254: L3.2 -3.5,9.1 L4.1
CAM_CAP: C3.2 U1.F12 | length 1.3
  Top Layer w0.127: C3.2 -5.75,-1.181 v1(-5.471,-0.902)
  Bottom Layer w0.127: v1(-5.471,-0.902) U1.F12
FPD_DATA: C1.2 J1.1 L1.1 | length 5.5
  Top Layer w0.254: J1.1 -7.5,6.3 C1.2 L1.1
FPD_DOUT_C_N: C2.2 R4.2 | length 1
  Top Layer w0.127: C2.2 R4.2
FPD_DOUT_N: C2.1 U2.13
FPD_DOUT_P: C1.1 U2.14
GND: C3.1 C4.1 C5.1 C6.1 C7.1 C8.1 C9.1 C10.1 C11.1 C12.1 C13.1 C14.1 C15.1 C16.1 C17.1 C18.1 C19.1 C20.1 C21.1 C22.1 C23.1 C24.1 C25.1 C26.1 C27.1 C28.1 C29.1 C30.1 C31.1 C32.1 C33.1 C34.1 C35.1 C36.1 C37.1 C38.1 C39.1 C40.1 C41.1 C42.1 C43.1 C44.1 C45.1 C46.1 C47.1 C48.1 C49.1 C50.1 C51.1 C52.1 C53.1 C54.1 C55.1 C56.1 C57.1 C58.1 J1.S1 J1.S2 J1.S3 J1.S4 R4.1 R5.2 U1.A2 U1.A3 U1.A6 U1.A9 U1.B2 U1.B12 U1.C1 U1.C3 U1.C5 U1.D8 U1.D9 U1.E2 U1.E7 U1.E8 U1.F2 U1.F5 U1.F9 U1.G3 U1.G6 U1.G10 U2.33 U3.5 U3.6 U3.7 U3.8 U3.15 U3.16 U3.17 U4.5 U4.6 U4.7 U4.8 U4.15 U4.16 U4.17 U5.2 U6.2 | length 5.6
  Bottom Layer w0.127: v1(-3.371,-1.602) U1.F9 ; U1.D9 -2.671,-0.202 v1(-1.971,-0.202) U1.E7 ; v1(-1.281,2.593) U1.A6@-0.93,2.243 ; v1(-0.571,-1.602) U1.F5 ; U1.G3 1.529,-1.602 U1.F2 v1(1.529,-0.902) ; U1.A3 v1(1.529,1.898) ; U1.B2 v1(2.229,1.198)
  other v1: 8.5,3.4 9.8,3.8 8.1,5.5 21.8,9.2 23.5,10.9 22.2,11.3
I2C_SCL: R1.1 U1.F6 U2.24 | length 2.2
  Top Layer w0.2: U2.24 v1(8.156,-2.5) 8.45,-2.5 8.525,-2.425 8.625,-2.425 8.75,-2.3 R1.1
  Bottom Layer w0.127: v1(-1.271,-0.902) U1.F6
I2C_SDA: R2.1 U1.E6 U2.23 | length 2.1
  Top Layer w0.2: U2.23 v1(8.156,-3) 8.625,-3 8.75,-3.125 R2.1
  Bottom Layer w0.127: v1(-1.271,-0.202) U1.E6
MIPI_CLK_N: U1.D12 U2.6 | length 13.1
  Top Layer w0.2: v1(1.35,-5) U2.6
  L2 - GND w0.127: v1(-5.471,0.498) -5.512,0.457 -5.711,0.457 -6.447,-0.279 -6.447,-1.326 -5.973,-1.8 -5.07,-1.8 -1.87,-5 v1(1.35,-5)
  Bottom Layer w0.2: v1(-5.471,0.498) U1.D12
MIPI_CLK_P: U1.D11 U2.5 | length 12.2
  Top Layer w0.2: v1(1.35,-4.5) U2.5
  L2 - GND w0.127: v1(-4.771,0.498) -5.11,0.159 -5.588,0.159 -5.81,-0.062 -5.81,-1.042 -5.349,-1.503 -4.947,-1.503 -1.95,-4.5 v1(1.35,-4.5)
  Bottom Layer w0.2: v1(-4.771,0.498) U1.D11
MIPI_D0_N: U1.C10 U2.4 | length 9.9
  Top Layer w0.2: v1(1.35,-4) U2.4
  L2 - GND w0.127: v1(-4.071,1.198) -2.747,-0.126 -2.747,-1.723 -0.47,-4 v1(1.35,-4)
  Bottom Layer w0.2: v1(-4.071,1.198) U1.C10
MIPI_D0_P: U1.C9 U2.3 | length 9.2
  Top Layer w0.2: v1(1.35,-3.5) U2.3
  L2 - GND w0.127: v1(-3.371,1.198) -2.45,0.277 -2.45,-1.6 -0.55,-3.5 v1(1.35,-3.5)
  Bottom Layer w0.2: v1(-3.371,1.198) U1.C9
MIPI_D1_N: U1.C11 U2.2 | length 17.3
  Top Layer w0.2: v1(1.35,-3) U2.2
  L2 - PWR/GND w0.127: v1(-4.771,1.198) -4.771,1.441 -5.24,1.91 -5.327,1.997 -5.973,1.997 -6.06,1.91 -7.06,0.91 -7.147,0.823 -7.147,-2.623 -7.06,-2.71 -6.27,-3.5 0.149,-3.5 0.75,-2.899 1.249,-2.899 v1(1.35,-3)
  Bottom Layer w0.2: v1(-4.771,1.198) U1.C11
MIPI_D1_P: U1.C12 U2.1 | length 15.9
  Top Layer w0.2: v1(1.35,-2.5) U2.1
  L2 - PWR/GND w0.127: v1(-5.471,1.198) -5.25,1.419 -5.25,1.5 -5.45,1.7 -5.85,1.7 -6.85,0.7 -6.85,-2.5 -6.147,-3.203 0.025,-3.203 0.627,-2.601 1.249,-2.601 v1(1.35,-2.5)
  Bottom Layer w0.2: v1(-5.471,1.198) U1.C12
MIPI_D2_N: U1.E10 U2.32 | length 10.4
  Top Layer w0.2: v1(-4.071,-0.202) -3.684,-0.589 -3.211,-0.589 -2.984,-0.362 -2.984,0.166 -2.15,1 1.156,1 3.003,-0.847 U2.32
  Bottom Layer w0.2: v1(-4.071,-0.202) U1.E10
MIPI_D2_P: U1.E9 U2.31 | length 10.2
  Top Layer w0.2: v1(-3.371,-0.202) -3.371,0.326 -2.31,1.387 1.316,1.387 3.503,-0.8 U2.31
  Bottom Layer w0.2: v1(-3.371,-0.202) U1.E9
MIPI_D3_N: U1.E12 U2.30 | length 14
  Top Layer w0.2: U2.30 v1(4.003,-0.847)
  L2 - PWR/GND w0.127: v1(-5.471,-0.202) -5.752,-0.202 -6.15,-0.6 -6.15,-1.2 -5.45,-1.9 -4.05,-1.9 -3.75,-2.2 -0.37,-2.2 0.33,-1.5 3.35,-1.5 v1(4.003,-0.847)
  Bottom Layer w0.2: v1(-5.471,-0.202) U1.E12
MIPI_D3_P: U1.E11 U2.29 | length 16.4
  Top Layer w0.2: U2.29 v1(4.503,-0.847)
  L2 - PWR/GND w0.127: v1(-4.771,-0.202) -5.11,0.136 -5.834,0.136 -6.447,-0.477 -6.447,-1.323 -5.573,-2.197 -4.173,-2.197 -3.873,-2.497 -0.247,-2.497 0.453,-1.797 3.553,-1.797 v1(4.503,-0.847)
  Bottom Layer w0.2: v1(-4.771,-0.202) U1.E11
NetR5_1: R5.1 U1.F10 | length 1.2
  Top Layer w0.127: R5.1 -4.233,-0.8 -4.131,-0.902 v1(-4.071,-0.902)
  Bottom Layer w0.127: v1(-4.071,-0.902) U1.F10
REG1V8_SS: C24.2 U4.9 | length 1.9
  Top Layer w0.127: U4.9 5.2,7.65 5.2,9.3 C24.2
REG1V8_SW: L6.1 U4.1 U4.2 U4.3 | length 4.4
  Top Layer w0.254: U4.1 8.55,6.15 L6.1@9.05,6.65 ; U4.2 L6.1@9.05,6.65 ; U4.3 8.95,7.15 L6.1@9.25,6.85 ; L6.1@9.05,6.65 L6.1@9.25,6.85 ; L6.1@9.05,6.65 9.3,6.65 L6.1 L6.1@9.25,6.85
REG3V3_SS: C19.2 U3.9 | length 1.9
  Bottom Layer w0.127: C19.2 18.9,5.4 18.9,7.05 U3.9
REG3V3_SW: L5.1 U3.1 U3.2 U3.3 | length 4.4
  Bottom Layer w0.254: U3.3 22.65,7.55 L5.1@22.95,7.85 ; U3.2 L5.1@22.75,8.05 ; U3.1 22.25,8.55 L5.1@22.75,8.05 ; L5.1@22.75,8.05 L5.1@22.95,7.85 ; L5.1@22.75,8.05 23,8.05 L5.1 L5.1@22.95,7.85
pads on no net: MP1.H1 MP1.H2 U1.A5 U1.A11 U1.B3 U1.B6 U1.B7 U1.B9 U1.C4 U1.C6 U1.C7 U1.D1 U1.D2 U1.D4 U1.D5 U1.E3 U1.E4 U1.E5 U1.F3 U1.F4 U1.F7 U1.G4 U1.G5 U1.G11 U2.7 U2.8 U2.9 U2.12 U2.17 U2.18 U2.19 U2.20 U2.21 U2.22 U2.27 U2.28 U3.4 U4.4 U5.4 U6.4

## Polygon pours and split planes (outlines as drawn)
GND on Bottom Layer "NONET_L-01_P-001" (solid, shelved, pour order 1): -11.45,7.8 -11.45,-7.8 11.45,-7.8 11.45,7.8 -11.45,7.8
GND on Top Layer "NONET_L-01_P-001" (solid, shelved, pour order 0): -15,10 -15,-10 15,-10 15,10

## Silkscreen, mask and mechanical layers (free items; w line width, h text height)
Board Shape:
  the board outline again, w0.2
Notes (Mech3):
  circle w0.1: c9,0 r1.75
  circle w0.1: c-9,0 r1.75
  circle w0.1: c0,0 r0.532
  lines w0.05: -1.271,0.148 0,0.148 0,0